# Altium PCB PCBV1.PcbDoc
Units mm, origin at the board's own origin, x right, y up, seen from the top; angles counter-clockwise.
Board outline 22.1 x 50 mm, 2 copper layers (Top Layer, Bottom Layer); 29 components, 25 nets, 109 pads, 14 vias.
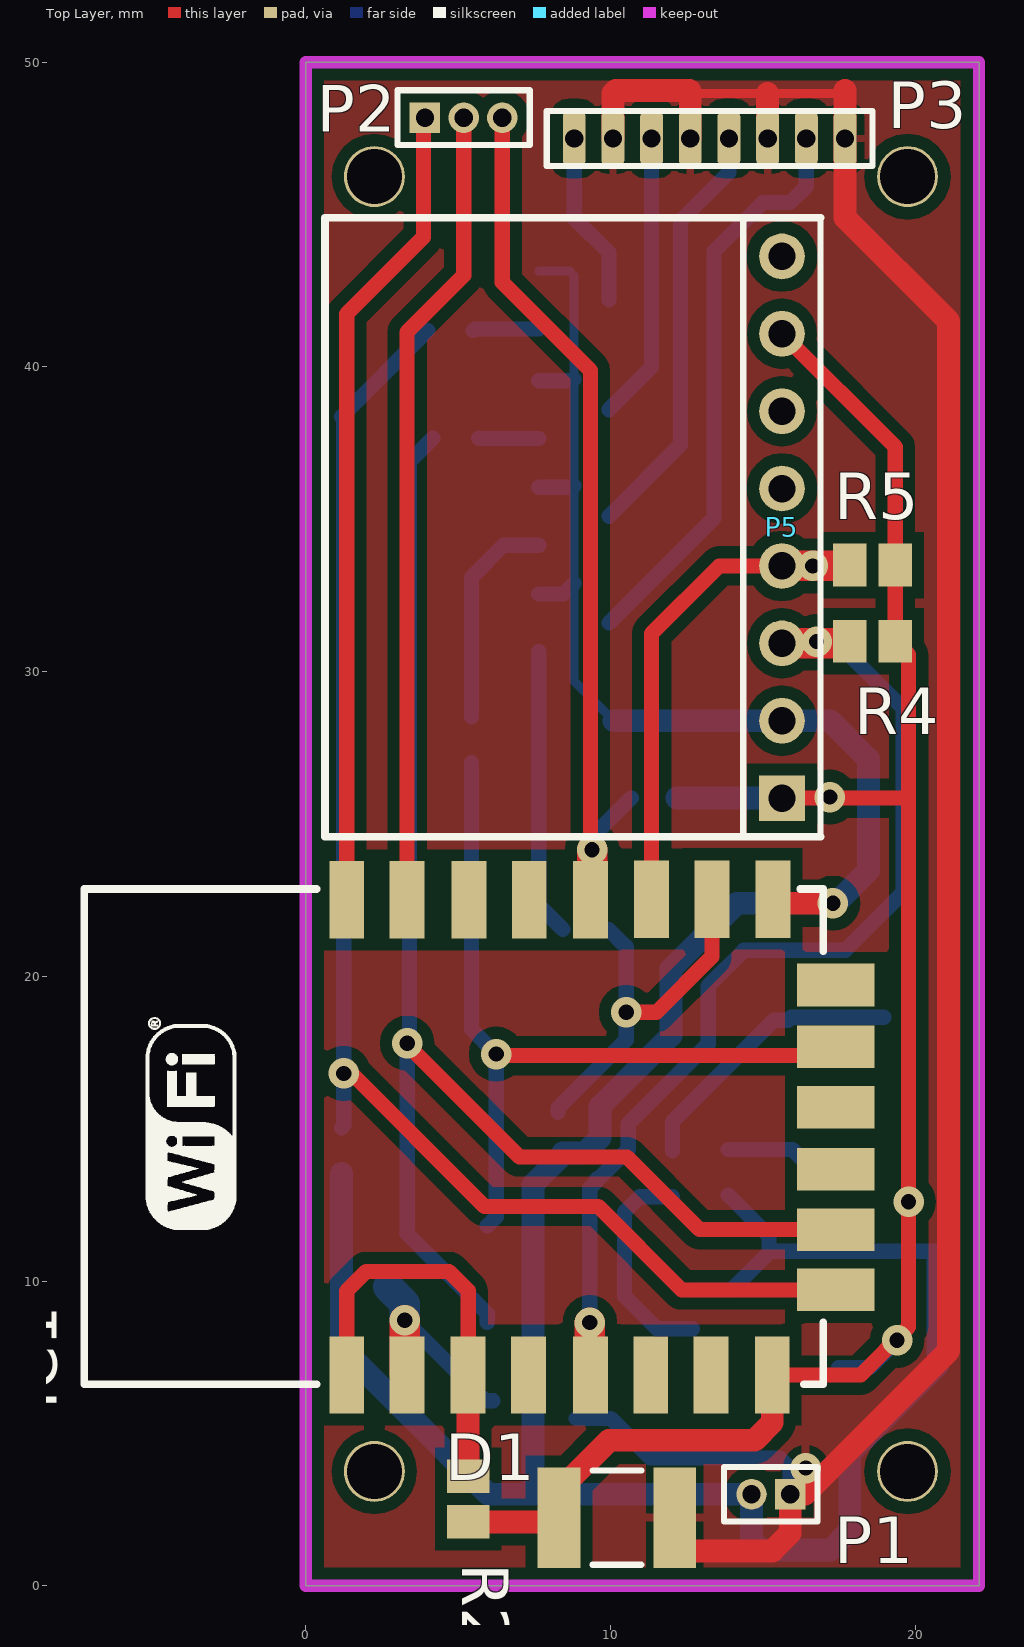
[diagram p0: Top Layer view]
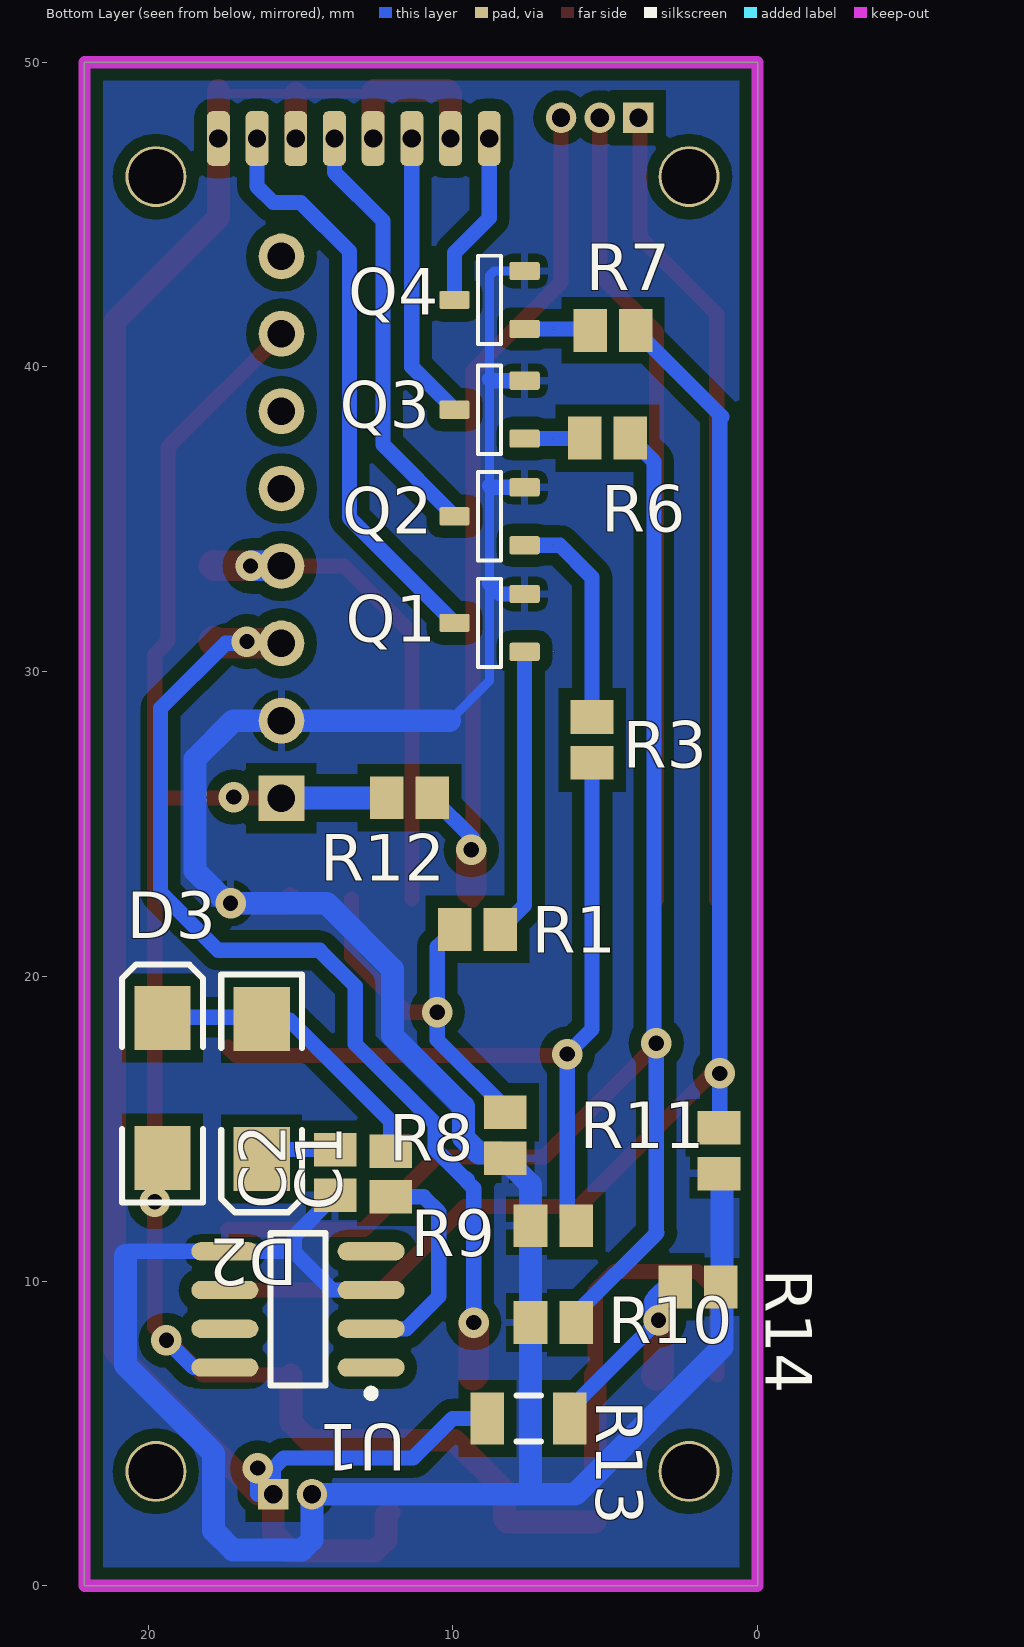
[diagram p1: Bottom Layer view, seen from below]

## Layer stack, top to bottom
Top Solder: solder mask 0.0102, Solder Resist, Dk 3.5
Top Layer: signal copper 0.0356
Dielectric 1: dielectric 0.32, FR-4, Dk 4.8
Bottom Layer: signal copper 0.0356
Bottom Solder: solder mask 0.0102, Solder Resist, Dk 3.5

## Board outline
0,0 22.1,0 22.1,50 0,50

## Design rules (kind name [scope] priority, off if disabled: settings)
Clearance [All] p1: gap=0.3 except(0.256: THPad-THPad; 0.4: Arc-Poly Arc-Region Track-Poly Track-Region SMDPad-Poly SMDPad-Region THPad-Poly THPad-Region Via-Poly Via-Region Fill-Poly Fill-Region Poly-Poly Poly-Region Region-Region)
PolygonConnect [All] p1: connectstyle=Relief reliefconductorwidth=0.254 reliefentries=4 polygonreliefangle="90 Angle" airgapwidth=0.254
RoutingVias [All] p1: holewidth=0.711 width=1.27 viastyle="Through Hole" minholewidth=0.711 minwidth=1.27 maxholewidth=0.711 maxwidth=1.27
SolderMaskExpansion [All] p1: expansion=0.102
Width [All] p1: maxlimit=2 minlimit=0.256 preferedwidth=0.5
30 further rules are at their usual default settings.

## Components (designator, comment, footprint, x,y, rotation, side; value= is the part's Value field where it differs from the comment)
C1 "Cap" C0805 12.04,13.513 r90 bottom
C2 "Cap" C0805 13.868,13.564 r90 bottom
D1 "Diode 1N5402" 1812 10.211,2.235 r180 top
D2 "Diode 1N5402" DSO-C2/Z6.7 16.281,16.307 r270 bottom
D3 "Diode 1N5402" DSO-C2/Z6.7 19.533,16.332 r90 bottom
IC1 "ESP8266 ESP-12-E" "ESP8266 ESP-12-E B" 17.75,23.5 r90 top
P1 "Header 2" MHDR1X2 15.9,3 r180 top
P2 "MHDR1X3" MHDR1X3 3.912,48.184 r0 top
P3 "MHDR1X8" MHDR1X8 17.7,47.5 r180 top
P5 "Header 8" HDR1X8 15.63,25.85 r90 top
Q1 "MOSFET-N" SOT23-3 8.8,31.6 r0 bottom
Q2 "MOSFET-N" SOT23-3 8.8,35.1 r0 bottom
Q3 "MOSFET-N" SOT23-3 8.8,38.6 r0 bottom
Q4 "MOSFET-N" SOT23-3 8.8,42.2 r0 bottom
R1 "Res3" C0805 9.195,21.539 r180 bottom
R2 "Res3" C0805 5.334,2.845 r90 top
R3 "Res3" C0805 5.436,27.762 r90 bottom
R4 "Res3" C0805 18.6,31 r0 top
R5 "Res3" C0805 18.6,33.5 r0 top
R6 "Res3" C0805 4.928,37.668 r0 bottom
R7 "Res3" C0805 4.75,41.199 r0 bottom
R8 "Res3" C0805 8.28,14.783 r270 bottom
R9 "Res3" C0805 6.706,11.811 r0 bottom
R10 "Res3" C0805 6.706,8.636 r0 bottom
R11 "Res3" C0805 1.27,14.275 r270 bottom
R12 "Res3" C0805 11.43,25.857 r180 bottom
R13 "Res3" C1206 7.518,5.486 r180 bottom
R14 "Res3" C0805 1.956,9.804 r180 bottom
U1 "LMC7660IM" M08A_N 15.088,9.068 r0 bottom

## Footprints (in the part's own frame and the unit in brackets; to place one, negate y for a bottom-side part, rotate by r counter-clockwise, add the part's x,y. Pads: shape width x height; smd on the part's side, far side on the other; paste and mask are expansions set on the pad)
1812 [mm] "Chip Capacitor, Body 4.5x3.2mm, IPC High Density"
  rect 1.4x3.3 smd: 1(-1.9,0) 2(1.9,0)
  silkscreen extent -0.8,-1.55 0.8,1.55, body extent -2.4,-1.7 2.4,1.7, height 1.4
C0805 [mm] "Chip Capacitor, Body 2.0x1.3mm, IPC High Density"
  rect 1.1x1.4 smd: 1(-0.75,0) 2(0.75,0)
  body extent -1.1,-0.72 1.1,0.72, height 1.4
C1206 [mm] "Chip Capacitor, Body 3.2x1.6mm, IPC High Density"
  rect 1.1x1.7 smd: 1(-1.35,0) 2(1.35,0)
  silkscreen extent -0.4,-0.75 0.4,0.75, body extent -1.7,-0.9 1.7,0.9, height 1.3
DSO-C2/Z6.7 [mm] "DO-214-AC/SMA; 2 C-Bend Leads; Body 5.3 x 2.6 mm, inc. leads (LxW)"
  rect 2.1x1.85 smd: 1(-2.3,0) 2(2.3,0)
  silkscreen extent -3.75,-1.33 4.05,1.33
"ESP8266 ESP-12-E B" [mil] "ESP8266 ESP-12-E"
  rect 100x45 smd: 1(-653,646) 2(-653,568) 3(-653,489) 4(-653,411) 5(-653,331) 6(-653,253) 7(-653,175) 8(-653,96) 15(-38,95) 16(-38,174) 17(-38,252) 18(-39,331) 19(-39,410) 20(-39,488) 21(-39,568) 22(-39,646)
  rect 55x100 smd: 9(-543,14) 10(-465,14) 11(-387,14) 12(-307,14) 13(-229,14) 14(-149,14)
  silkscreen extent -665,30 -25,985
HDR1X8 [mm] "Connector; Header; 8 Position"
  rect 1.5x1.5 hole 0.9: 1(0,0)
  round 1.5 hole 0.9: 2(2.54,0) 3(5.08,0) 4(7.62,0) 5(10.16,0) 6(12.7,0) 7(15.24,0) 8(17.78,0)
  silkscreen extent -1.27,-1.27 19.05,1.27
M08A_N [mm] "SOIC, 8-Leads, Body 4.9x3.9mm, Pitch 1.27mm, IPC Medium Density"
  oval 2.2x0.6 smd: 1(-2.4,1.905) 2(-2.4,0.635) 3(-2.4,-0.635) 4(-2.4,-1.905) 5(2.4,-1.905) 6(2.4,-0.635) 7(2.4,0.635) 8(2.4,1.905)
  silkscreen extent -2.52,-2.5 0.9,2.88, body extent -2,-2.5 2,2.5, height 1.75
MHDR1X2 [mm] "Connector; Header; 2 Position"
  rect 1x1 hole 0.6: 1(0,0)
  round 1 hole 0.6: 2(1.27,0)
  silkscreen extent -0.9,-0.9 2.17,0.9
MHDR1X3 [mm] "Connector; Header; 3 Position"
  rect 1x1 hole 0.6: 1(0,0)
  round 1 hole 0.6: 2(1.27,0) 3(2.54,0)
  silkscreen extent -0.9,-0.9 3.44,0.9
MHDR1X8 [mm] "Connector; Header; 8 Position"
  rrect50% 0.75x1.8 hole 0.6: 1(0,0) 2(1.27,0) 3(2.54,0) 4(3.81,0) 5(5.08,0) 6(6.35,0) 7(7.62,0) 8(8.89,0)
  silkscreen extent -0.9,-0.9 9.79,0.9
SOT23-3 [mm] "SOT23, 3 pin"
  round 0.5 on Mech15: 0(0,0)
  rrect25% 1x0.6 smd: 1(-1.15,0.95) 2(-1.15,-0.95) 3(1.15,0)
  silkscreen extent -0.38,-1.45 0.38,1.45, body extent -1.4,-1.45 1.4,1.45, height 1.29

## Part data
C1 C2: "Capacitor"
D1 D2 D3: "3 Amp General Purpose Rectifier"
P1: "Header, 2-Pin"
P2: "Header, 3-Pin"
P3 P5: "Header, 8-Pin"
Q1 Q2 Q3 Q4: "N-Channel MOSFET"
R1 R2 R3 R4 R5 R6 R7 R8 R9 R10 R11 R12 R13 R14: "Resistor"
U1: "Switched Capacitor Voltage Converter, 8-pin Narrow SOIC"

## Free pads (board coordinates)
  round 2 hole 1.8: 0(2.25,3.75) 1(19.75,3.75) 3(2.25,46.25) 4(19.75,46.25)

## Via types
v1: diameter 1, hole 0.5, Top Layer to Bottom Layer, 14 vias

## Nets (pads, with @x,y where several pads share a name; then routed paths per layer and width w, separated by ;. In a path a pad name is that pad's centre, name@x,y a point inside that pad or via, vN(x,y) a via of type N, cw(c..) or ccw(c..) an arc to the next point about the centre after c; other vN are vias at no path point)
ADC: IC1.2 R13.2 R14.1 | length 7.1
  Top Layer w1: v1(3.251,8.712) 3.251,6.985 IC1.2
  Bottom Layer w0.5: v1(3.251,8.712) 5.893,6.071 R13.2@6.143,6.071
  Bottom Layer w1: R14.1 3.251,9.259 v1(3.251,8.712)
BOOT: IC1.18 P2.3 R12.2 | length 30.8
  Top Layer w0.5: P2.3 6.452,42.774 9.343,39.883 IC1.18 9.347,22.505 9.398,22.556 IC1.18@9.398,22.835
  Top Layer w1: IC1.18@9.398,22.835 v1(9.398,24.155)
  Bottom Layer w0.5: v1(9.398,24.155) 9.398,24.474 9.347,24.524 R12.2
GND: C2.1 IC1.15 P1.2 P5.2 Q1.2 Q2.2 Q3.2 Q4.2 R8.2 R9.2 R10.2 R11.2 R14.2 U1.3 U1.5 | length 109.5
  Top Layer w0.75: IC1.15 15.472,22.4 v1(17.3,22.4)
  Bottom Layer w0.3: Q4.2 8.65,43.15 8.8,43 8.8,39.6 8.8,36.1 8.8,32.9 8.8,29.7 10.11,28.39
  Bottom Layer w0.5: Q1.2 8.45,32.55 8.8,32.9 ; Q2.2 8.75,36.05 8.8,36.1 ; Q3.2 8.75,39.55 8.8,39.6 ; U1.3 13.97,9.703 15.24,10.973 ; C2.1 15.201,11.481 15.201,11.012 15.24,10.973 ; 20.752,10.846 20.625,10.973 U1.5 15.24,10.973
  Bottom Layer w0.75: R11.2@1.168,13.525 1.168,7.823 5.992,3 7.315,3 ; R8.2@8.412,14.122 7.456,13.165 R9.2 R10.2 7.456,3.14 7.315,3 ; R8.2@8.433,14.199 9.151,14.199 9.655,14.703 9.655,15.726 11.989,18.059 11.989,20.244 14.145,22.4 v1(17.3,22.4) 17.4,22.4 18.466,23.466 18.466,27.134 17.21,28.39 P5.2 10.11,28.39 ; 20.752,10.846 20.752,7.239 17.856,4.343 17.856,1.803 17.221,1.168 14.961,1.168 14.63,1.499 P1.2 7.315,3
I2C_SCL: IC1.5 P5.3 R4.1 | length 35.2
  Top Layer w1: v1(9.322,8.636) 9.322,6.935 IC1.5 ; P5.3 17.78,30.93 R4.1
  Bottom Layer w0.5: v1(9.322,8.636) 9.322,13.046 9.53,13.255 9.53,13.322 9.591,13.383 9.643,13.383 10.58,14.32 10.58,15.152 13.208,17.78 13.208,19.685 14.376,20.853 17.704,20.853 19.6,22.75 19.6,28.8 17.47,30.93 P5.3
  other v1: 16.764,30.988
I2C_SDA: IC1.17 P5.4 R5.1 | length 17.2
  Top Layer w0.5: IC1.17 11.349,31.249 13.57,33.47 P5.4
  Top Layer w1: P5.4 17.82,33.47 R5.1
  Bottom Layer w1: P5.4 v1(16.643,33.47)
NetC1_1: C1.1 U1.2 | length 7.2
  Bottom Layer w0.5: C1.1 10.959,12.763 10.465,12.268 10.465,9.5 11.532,8.433 U1.2
NetC1_2: C1.2 D2.1 D3.2 | length 9.3
  Bottom Layer w0.5: C1.2 12.04,15.24 15.356,18.556 15.824,18.556 15.926,18.658 D3.2@18.974,18.658
NetC2_2: C2.2 D2.2 | length 2.5
  Bottom Layer w0.5: C2.2 15.975,14.314 D2.2
NetIC1_1: IC1.1 IC1.3 R2.2 | length 13.4
  Top Layer w0.5: IC1.1 1.342,9.673 1.981,10.312 4.699,10.312 5.329,9.682 IC1.3 ; R2.2@5.329,3.599 R2.2
  Top Layer w0.75: R2.2@5.329,3.599 IC1.3
NetP3_2: P3.2 Q1.3 | length 19.1
  Bottom Layer w0.5: Q1.3 13.4,35.05 13.4,43.8 15,45.4 15.9,45.4 16.43,45.93 P3.2
NetP3_4: P3.4 Q2.3 | length 14
  Bottom Layer w0.5: Q2.3 12.3,37.45 12.3,44.8 13.89,46.39 P3.4
NetP3_6: P3.6 Q3.3 | length 9.5
  Bottom Layer w0.5: Q3.3 11.35,40 P3.6
NetP3_8: P3.8 Q4.3 | length 5.8
  Bottom Layer w0.5: P3.8 8.81,44.89 9.95,43.75 Q4.3
NetQ1_2: Q1.1 R1.2 | length 9.4
  Bottom Layer w0.5: Q1.1 7.65,22.334 R1.2
NetQ2_2: Q2.1 R3.2 | length 7.2
  Bottom Layer w0.5: R3.2 5.436,33.096 6.489,34.15 Q2.1
NetQ3_2: Q3.1 R6.2 | length 2
  Bottom Layer w0.5: R6.2 5.696,37.65 Q3.1
NetQ4_2: Q4.1 R7.2 | length 2.2
  Bottom Layer w0.5: R7.2 5.551,41.25 Q4.1
PWM0: IC1.16 R1.1 R8.1 | length 12.6
  Top Layer w0.5: v1(10.516,18.821) 11.506,18.821 13.33,20.646 IC1.16
  Bottom Layer w0.5: R8.1 8.28,15.672 10.516,17.907 v1(10.516,18.821) 10.516,20.968 R1.1
PWM1: IC1.13 R3.1 R9.1 | length 26.9
  Top Layer w0.5: v1@6.248,17.399 17.11,17.399 IC1.13
  Bottom Layer w0.5: R3.1 5.436,18.263 v1(6.248,17.45) 6.248,12.104 R9.1
PWM2: IC1.10 R6.1 R10.1 | length 47.1
  Top Layer w0.5: v1(3.327,17.805) 3.302,17.78 7.01,14.072 10.541,14.072 12.924,11.689 IC1.10
  Bottom Layer w0.5: R6.1 3.404,36.894 3.404,17.882 v1(3.327,17.805) 3.327,11.608 3.302,11.582 5.956,8.929 R10.1
PWM3: IC1.9 R7.1 R11.1 | length 46.9
  Top Layer w0.5: v1(1.245,16.815) 1.245,17.069 5.867,12.446 9.601,12.446 12.339,9.708 IC1.9
  Bottom Layer w0.5: R11.1@1.168,15.025 1.245,15.101 v1(1.245,16.815) 1.245,38.291 1.168,38.367 R7.1
RX: IC1.21 P2.2 | length 26.4
  Top Layer w0.5: IC1.21 3.323,41.143 5.182,43.002 P2.2
TX: IC1.22 P2.1 | length 26.2
  Top Layer w0.5: IC1.22 1.342,41.742 3.861,44.261 P2.1@3.861,47.7
VCC: D1.2 D3.1 IC1.8 P5.1 P5.7 R2.1 R4.2 R5.2 R12.1 U1.8 | length 62.8
  Top Layer w0.5: IC1.8 18.214,6.914 19.787,8.487 19.787,25.85 ; P5.1 19.787,25.85 ; P5.7 19.35,37.37 R5.2 R4.2 19.787,30.563 19.787,25.85
  Top Layer w0.75: R2.1 8.221,2.095 8.311,2.184 D1.2 8.311,3.129 9.957,4.775 14.732,4.775 15.312,5.355 IC1.8
  Bottom Layer w0.5: U1.8 18.517,7.163 v1(19.406,8.052)
  Bottom Layer w0.75: R12.1 15.623,25.857 P5.1
  other v1: 19.787,12.598 17.196,25.883
VCC_BAT: D1.1 P1.1 P3.1 P3.3 P3.5 P3.7 R13.1 | length 78.7
  Top Layer w0.3: 12.62,48.98 15.16,48.98 17.609,48.98 17.7,49.071
  Top Layer w0.75: P3.7 10.08,48.98 10.175,49.075 12.596,49.075 12.62,49.051 12.62,48.98 P3.5 ; D1.1@12.1,2.4 12.2,2.3 12.2,1.5 12.557,1.143 15.316,1.143 15.9,1.727 P1.1 16.386,3 21.1,7.714 21.1,41.5 17.7,44.9 P3.1 17.7,49.071 ; P3.3 15.16,48.98
  Bottom Layer w0.5: R13.1 10.011,5.486 11.307,4.191 15.557,4.191 15.9,3.848 P1.1 ; P1.1@15.9,3.352 P1.1 ; v1(16.408,3.861) 16.408,2.997 16.406,3 P1.1
pads on no net: IC1.4 IC1.6 IC1.7 IC1.11 IC1.12 IC1.14 IC1.19 IC1.20 P5.5 P5.6 P5.8 Q1.0 Q2.0 Q3.0 Q4.0 U1.1 U1.4 U1.6 U1.7

## Polygon pours and split planes (outlines as drawn)
VCC_BAT on Top Layer "Plano_VCC_BAT" (solid, pour order 0): 0,0 22,0 22,50 0,50
GND on Bottom Layer "Plano_GND" (solid, pour order 10): 0,50 22.098,50 22.098,0 0,0

## Keep-outs
Keep-Out Layer:
  the board outline again, w0.4

## Silkscreen, mask and mechanical layers (free items; w line width, h text height)
Top Overlay:
  lines w0.256: 16.9,24.58 0.63,24.58 0.63,44.9 16.9,44.9

## Text inside footprints (layer, text, board x,y; h text height)
IC1: Mechanical 13 "ANTENNA AREA" at -6.649,6.915 h0.25 r90; Mechanical 13 "CUTOUT POLYGON" at -6.141,6.915 h0.25 r90